# Allegro board PULSE MODULATION1.brd
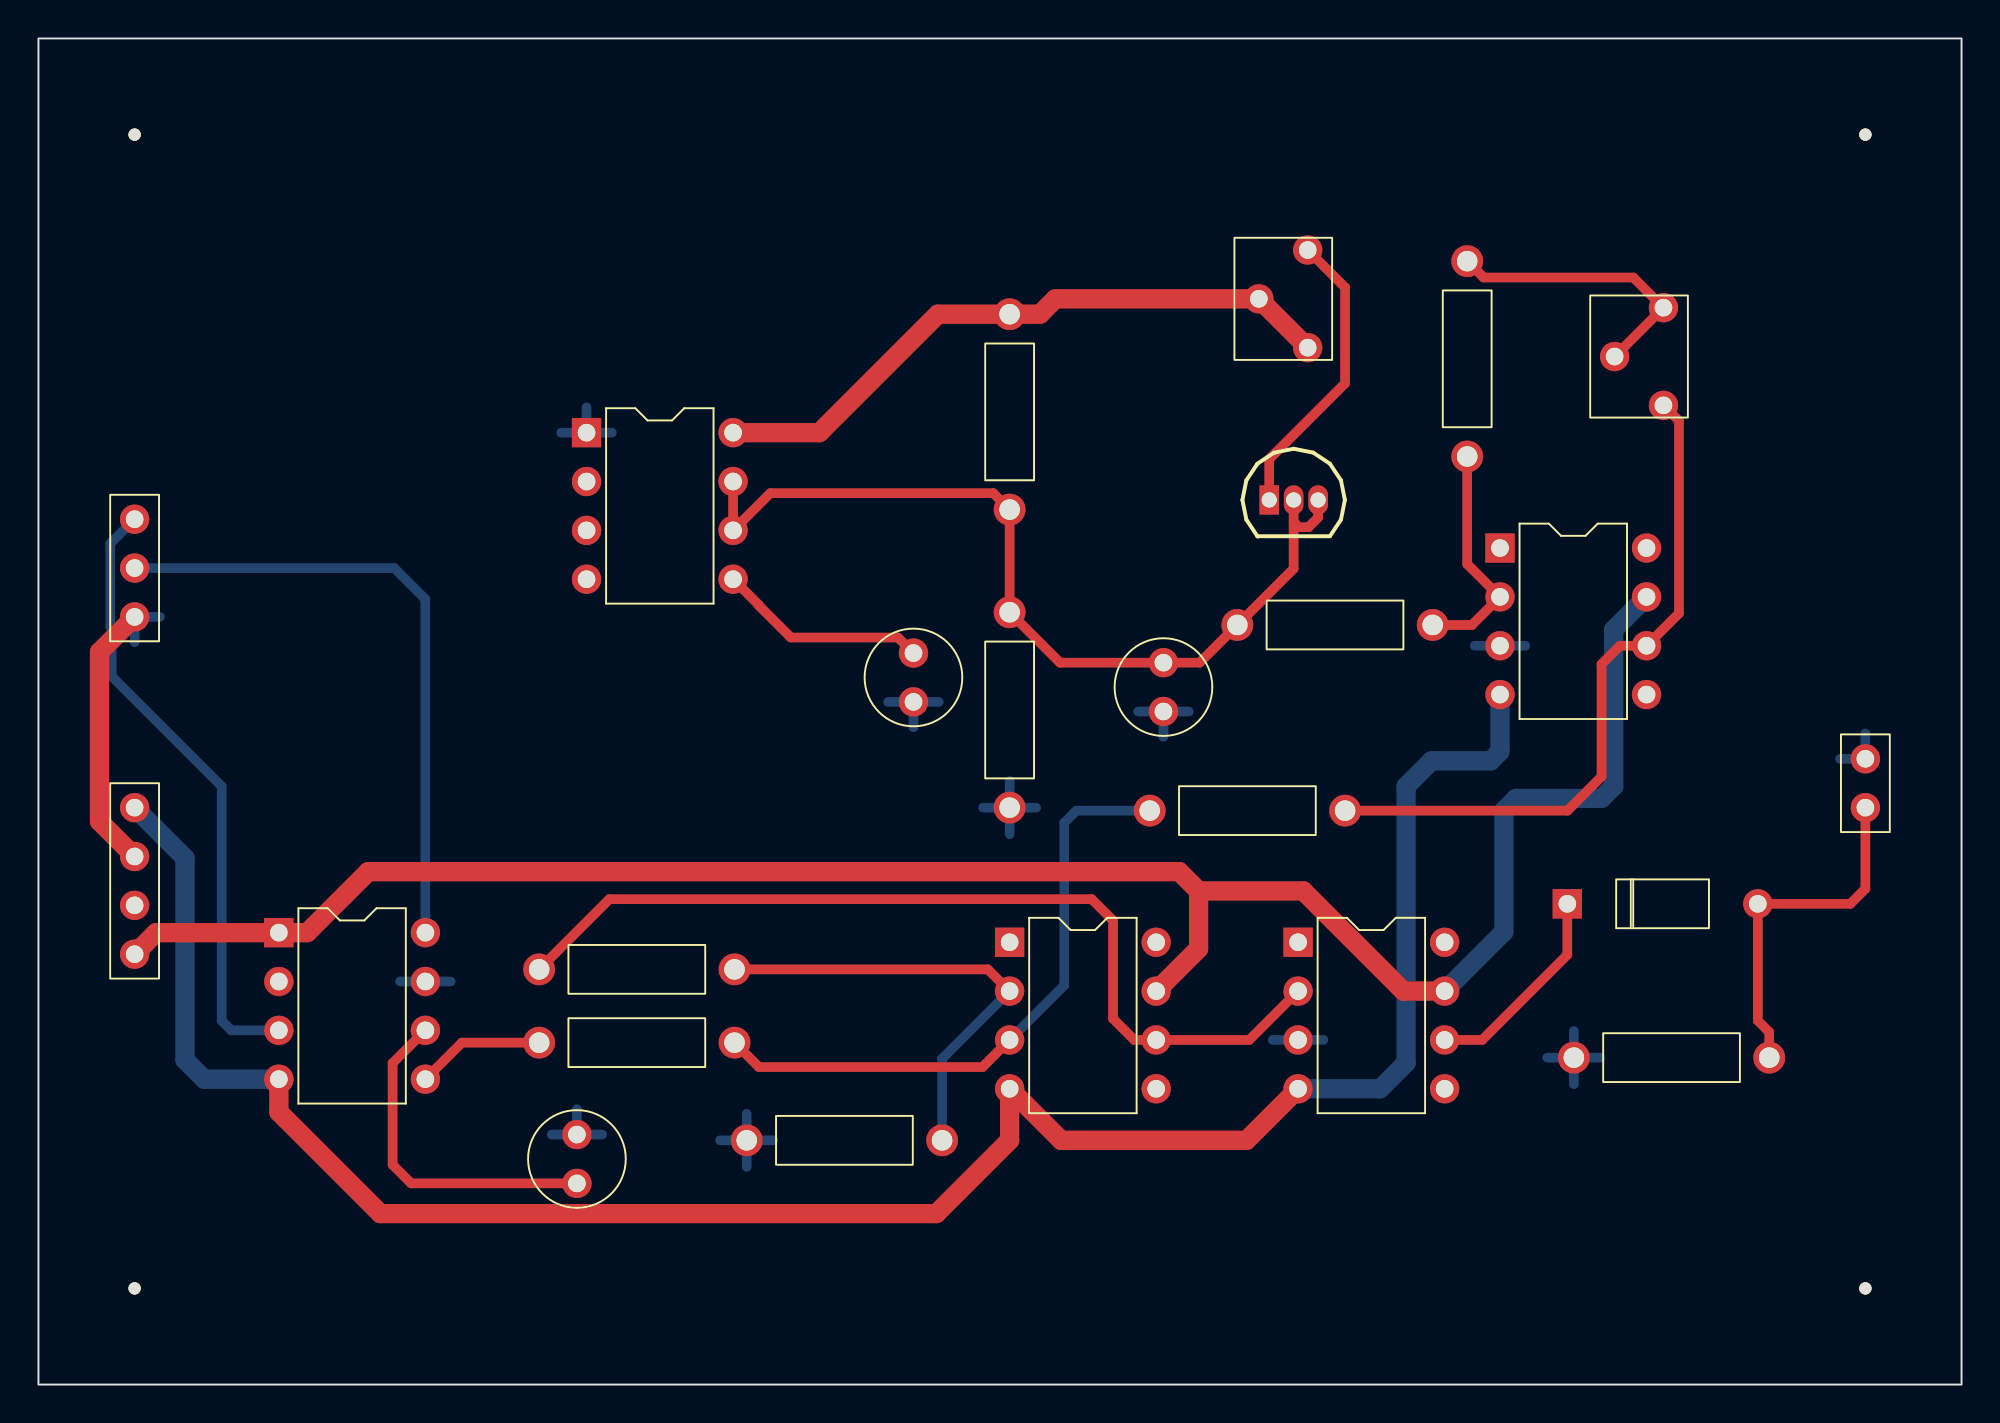
[diagram p0: board, top side]
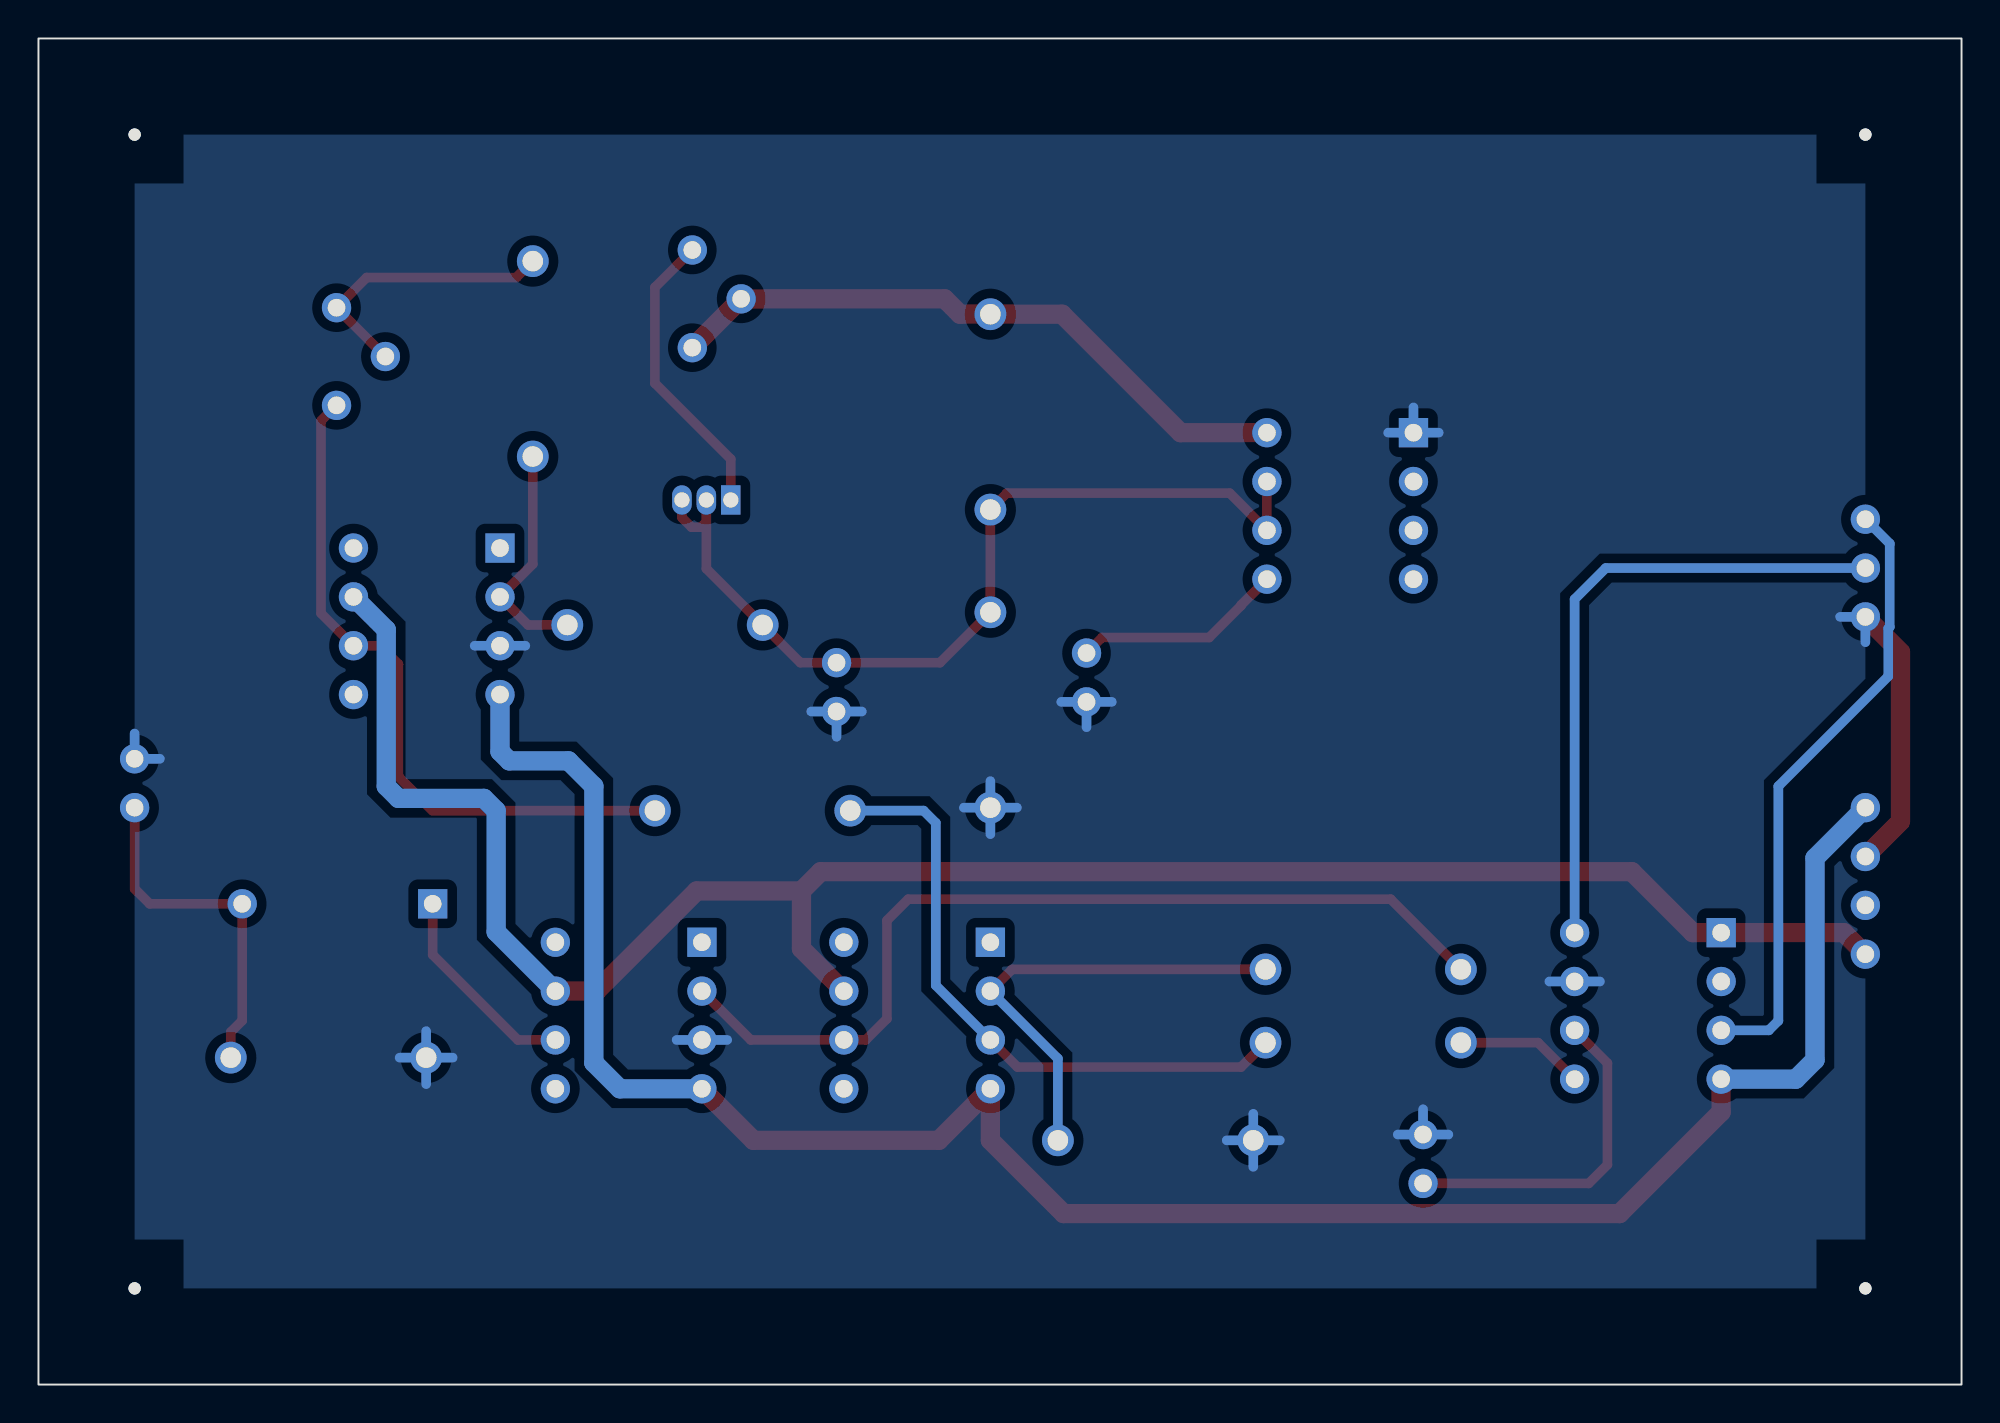
[diagram p1: board, bottom side, seen from below]

Outline 100 x 70 mm; copper layers: TOP, BOTTOM. Coordinates in mm from the lower left corner of the outline.
Outline path: rectangle 0,0 100,70

## Design rules (mm)
constraint set DEFAULT: min track width 0.5

## Placement (name value [footprint] x y rotation side)
C1  0.01uF  [CAP196]  58.5 35 0 top
C2  0.01uF  [CAP196]  45.5 35.5 0 top
C3  0.01uF  [CAP196]  28 13 180 top
D1  d  [DO41]  79.5 25 270 top
J1  CON4  [JUMPER4]  5 30 270 top
J2  CON3  [JUMPER3]  5 45 270 top
J3  CON2  [JUMPER2]  95 30 90 top
NOREF  -  [unnamed]  5 5 0 top
NOREF#2  -  [unnamed]  5 65 0 top
NOREF#3  -  [unnamed]  95 65 0 top
NOREF#4  -  [#2]  100 0 90 top
NOREF#5  -  [unnamed]  95 5 0 top
NOREF#6  -  [#2]  0 70 0 top
Q1  2SA1020  [TO92]  64 46 0 top
R1  560  [RES400]  74.3 58.42 180 top
R2  39K  [RES400]  50.5 45.5 0 top
R3  6.2K  [RES400]  72.5 39.5 90 top
R4  100K  [RES400]  50.5 30 0 top
R5  10K  [RES400]  57.78 29.84 270 top
R6  10K  [RES400]  26.04 21.59 270 top
R7  10K  [RES400]  36.2 17.78 90 top
R8  10K  [RES400]  46.99 12.7 90 top
R9  10K  [RES400]  90 17 90 top
U1  NE555  [DIP8_3]  28.5 49.5 0 top
U2  LF356  [DIP8_3]  76 43.5 0 top
U3  LF398  [DIP8_3]  12.5 23.5 0 top
U4  LF356  [DIP8_3]  50.5 23 0 top
U5  LF356  [DIP8_3]  65.5 23 0 top
VR1  5K  [RESADJ]  66 59 0 top
VR2  20K  [RESADJ]  84.5 56 0 top

## Library data of the parts
C1-C3 = C: Tolerance: ***; User Part Number: ***
D1 = d_0
J1 = CON4: User Part Number: ***
J2 = CON3: User Part Number: ***
J3 = CON2: User Part Number: ***
Q1 = 2SA1020
R1-R9 = R: Tolerance: ***; User Part Number: ***
U1 = NE555_1: Tolerance: ***; User Part Number: ***
U2 U4 U5 = LF356_9: Tolerance: ***; User Part Number: ***
U3 = LF398: Tolerance: ***; User Part Number: ***
VR1 VR2 = POT: Tolerance: ***; User Part Number: ***

## Footprints (pads in the part's own frame, mm; a bottom-side part is the same pattern mirrored in y, then rotated)
CAP196
  round 1.524 hole 0.914: 1(0,0) 2(0,2.54)
DIP8_3
  rect 1.524x1.524 hole 0.914: 1(0,0)
  round 1.524 hole 0.914: 2(0,-2.54) 3(0,-5.08) 4(0,-7.62) 5(7.62,-7.62) 6(7.62,-5.08) 7(7.62,-2.54) 8(7.62,0)
DO41
  rect 1.524x1.524 hole 0.914: 1(0,0)
  round 1.524 hole 0.914: 2(0,9.906)
JUMPER2
  round 1.524 hole 0.914: 1(0,0) 2(2.54,0)
JUMPER3
  round 1.524 hole 0.914: 1(0,0) 2(2.54,0) 3(5.08,0)
JUMPER4
  round 1.524 hole 0.914: 1(0,0) 2(2.54,0) 3(5.08,0) 4(7.62,0)
RES400
  round 1.651 hole 1.067: 1(0,0) 2(0,10.16)
RESADJ
  round 1.524 hole 0.914: 1(0,0) 2(-2.54,-2.54) 3(0,-5.08)
TO92
  rect 1.016x1.524 hole 0.787: 1(0,0)
  oval 1.016x1.524 hole 0.787: 2(1.27,0) 3(2.54,0)
unnamed
  round 0.635 hole 3.175 unplated: (0,0)

## Nets
5V: J1.3
+5V: R2.2 U1.8(VCC) VR1.2(WIPER) VR1.3
+15V: J1.4 U2.7 U3.1 U4.7 U5.7
-15V: J1.1 U2.4(V-) U3.4(V-) U4.4(V-) U5.4(V-)
GND: C1.1 C2.1 C3.1 J1.2 J2.3 J3.2 R4.1 R8.2 R9.2 U1.1 U2.3 U3.7 U5.3
CLOCK: U1.2
SIG_1: R5.2 U2.6 VR2.3
N00940: C1.2 Q1.2 Q1.3 R2.1 R3.2 R4.2 U1.6 U1.7
N001074: C2.2 U1.5
N01843: Q1.1(E) VR1.1
N02042: R1.2 R3.1 U2.2
N02185: R1.1 VR2.1 VR2.2(WIPER)
N03397: J2.1 U3.3
N03832: R5.1 R7.1 U4.3
N04383: R6.2 R8.1 U4.2
N04605: R6.1 U4.6 U5.2
N05176: D1.2 J3.1 R9.1
N06164: J2.2 U3.8
N06176: C3.2 U3.6
N07735: R7.2 U3.5
N09005: D1.1 U5.6

Pads without a net: U1 3 4; U2 1 5 8; U3 2; U4 1 5 8; U5 1 5 8

## Routing (per net, layer and track width the routed paths; a pad name or vN(x,y) marks a point on that pad's centre or on a via; arc(x,y) is an arc through that point)
+5V: length 33.8
  TOP w1: VR1.3 VR1.2 52.88,56.46 52.08,55.66 R2.2 46.77,55.66 40.61,49.5 U1.8
+15V: length 106
  TOP w1: 60.33,25.67 65.77,25.67 70.98,20.46 U5.7 ; 60.33,25.67 59.33,26.67 17.14,26.67 13.97,23.5 U3.1 6.12,23.5 J1.4 ; 60.33,25.67 60.33,22.66 U4.7
  BOTTOM w1: U5.7 76.2,23.54 76.2,29.84 76.83,30.48 81.28,30.48 81.92,31.11 81.92,39.26 U2.7
-15V: length 112
  TOP w1: U3.4 12.5,14.17 17.78,8.89 46.69,8.89 50.5,12.7 U4.4 53.18,12.7 62.82,12.7 U5.4
  BOTTOM w1: J1.1 7.62,27.38 7.62,16.88 8.62,15.88 U3.4 ; U5.4 69.77,15.38 71.12,16.73 71.12,31.11 72.44,32.43 75.52,32.43 76,32.92 U2.4
GND: length 59.4
  TOP w1: J1.2 3.17,29.29 3.17,38.09 J2.3
  BOTTOM w0.5: C1.1 59.81,35 ; C1.1 57.19,35 ; C1.1 58.5,33.69 ; 26.68,13 C3.1 ; C3.1 29.32,13 ; C3.1 28,14.31 ; R8.2 38.21,12.7 ; R8.2 35.45,12.7 ; R8.2 36.83,11.32 ; R8.2 36.83,14.08 ; R4.1 51.88,30 ; R4.1 50.5,28.62 ; R4.1 50.5,31.38 ; R4.1 49.12,30 ; 21.43,20.96 U3.7 18.8,20.96 ; 77.31,38.42 U2.3 74.69,38.42 ; C2.1 46.81,35.5 ; C2.1 45.5,34.19 ; C2.1 44.19,35.5 ; 66.81,17.92 U5.3 64.19,17.92 ; 6.32,39.92 J2.3 5,38.6 ; 79.84,15.62 R9.2 ; R9.2 81.22,17 ; R9.2 79.84,18.38 ; R9.2 78.46,17 ; U1.1 29.82,49.5 ; U1.1 27.18,49.5 ; U1.1 28.5,50.81 ; 93.69,32.54 J3.2 95,33.85
SIG_1: length 36.2
  TOP w0.5: VR2.3 85.31,50.11 85.31,40.11 U2.6 82.24,38.42 81.28,37.46 81.28,31.61 79.51,29.84 R5.2
N00940: length 47.4
  TOP w0.5: 65.27,44.86 65.27,42.43 R3.2 60.38,37.54 C1.2 53.12,37.54 R4.2 R2.1 49.65,46.35 38.05,46.35 U1.6 U1.7 ; 65.27,44.86 Q1.2 ; 65.27,44.86 65.55,44.59 66.04,44.59 66.54,45.09 Q1.3
N001074: length 11
  TOP w0.5: C2.2 44.69,38.85 39.12,38.85 37.47,40.51 37.47,40.53 U1.5
N01843: length 15.4
  TOP w0.5: VR1.1 67.94,57.05 67.94,52.07 64,48.12 Q1.1
N02042: length 12.1
  TOP w0.5: R3.1 74.54,39.5 U2.2 74.3,42.66 R1.2
N02185: length 14.8
  TOP w0.5: VR2.2 VR2.1 82.93,57.57 75.15,57.57 R1.1
N03397: length 32.2
  BOTTOM w0.5: U3.3 10.03,18.42 9.53,18.92 9.53,31.11 3.81,36.83 3.81,39.32 3.73,39.4 3.73,43.73 J2.1
N03832: length 32.8
  TOP w0.5: 36.02,17.96 R7.1 37.47,16.51 49.09,16.51 U4.3
  BOTTOM w0.5: U4.3 53.34,20.76 53.34,29.21 53.98,29.84 R5.1
N04383: length 24
  TOP w0.5: R6.2 49.37,21.59 U4.2
  BOTTOM w0.5: R8.1 46.99,16.95 U4.2
N04605: length 48.1
  TOP w0.5: R6.1 29.68,25.24 54.77,25.24 55.88,24.13 55.88,19.02 56.98,17.92 U4.6 62.96,17.92 U5.2
N05176: length 18.4
  TOP w0.5: J3.1 95,25.78 94.22,25 D1.2 89.41,18.92 90,18.33 R9.1
N06164: length 33.1
  BOTTOM w0.5: U3.8 20.12,40.84 18.5,42.46 J2.2
N06176: length 17.7
  TOP w0.5: C3.2 19.39,10.46 18.41,11.43 18.41,16.71 U3.6
N07735: length 6.7
  TOP w0.5: R7.2 22.02,17.78 U3.5
N09005: length 10.9
  TOP w0.5: D1.1 79.5,22.35 75.07,17.92 U5.6

## Copper pours and planes (outline as drawn; the poured copper is in the pictures)
GND on BOTTOM: 5,5 5,65 95,65 95,5 ; 1 cut-out

## Text on the board
User.Comments: Electronic CAD | PULSE MODULATION
DIMENSION: FIGURE | FINISHED_SIZE | 0.787 | 0.914 | 1.067 | 3.175 | DRILL CHART: TOP to BOTTOM | ALL UNITS ARE IN MILLIMETERS | PLATED | NON-PLATED | QTY | 3 | 63 | 18 | 4
